# EAGLE board PowerSystemOverview (EAGLE 9.2.1)

Size 160 x 100 mm. Coordinates in mm from the lower left corner, seen from the top.
Outline: 0,0 160,0 160,100 0,100 0,0
Copper layers (1*16): Top 0.035mm / dielectric 1.5mm / Bottom 0.035mm
Design rules "default": minimum track width 6mil, minimum drill 0.35mm, track to track 6mil, track to pad 6mil, pad to pad 6mil, via to via 6mil, smd to smd 6mil, copper to edge 40mil, drill to drill 6mil, minimum pad ring 10mil, minimum via ring 8mil, stop-mask expansion 4mil, vias tented up to drill 0mil, thermal gap 10mil

## Footprints (pad centres in the part's own frame; a part is rotated, then mirrored left to right if it is on the bottom)
0603-POLAR = smd 1.1 x 1: + 0.85,0; - -0.85,0
0402 = smd 0.85 x 0.9: 1 -0.58,0; 2 0.58,0
DO35-10 = drill 0.813 long: A 5.08,0; C -5.08,0
LED_SML0603 = smd 0.8 x 0.8: A 0.75,0; C -0.75,0
SUPER-SOT3 = smd 1 x 1.4: 1 -0.95,-1.1; 2 0.95,-1.1; 3 0,1.1
1210 = smd 1.27 x 2.06: 1 -1.755,0; 2 1.755,0
MSOP8 = smd 0.4 x 1.1: 1 -0.975,-2.25; 2 -0.325,-2.25; 3 0.325,-2.25; 4 0.975,-2.25; 5 0.975,2.25; 6 0.325,2.25; 7 -0.325,2.25; 8 -0.975,2.25
18650-CASE-PTH = drill 2 octagon: NEG -35.56,0; POS 35.56,0

## Placement (x,y rotation side)
C1  10uF  [0603-POLAR]  2.54,-15.24 0 top  (outside the outline)
C2  10uF  [0603-POLAR]  2.54,-62.23 0 top  (outside the outline)
C3  0.1uF  [0402]  2.54,-66.04 0 top  (outside the outline)
D1  1N4148DO35-10  [DO35-10]  7.62,-10.16 0 top  (outside the outline)
LED1  [LED_SML0603]  2.54,-25.4 0 top  (outside the outline)
Q1  FDN360P  [SUPER-SOT3]  2.54,-35.56 0 top  (outside the outline)
R1  0.1  [1210]  3.81,-20.32 0 top  (outside the outline)
R2  100K  [0402]  2.54,-29.21 0 top  (outside the outline)
U1  MCP7384XX  [MSOP8]  3.81,-3.81 0 top
U$1  18650PTH  [18650-CASE-PTH]  38.1,-49.53 0 top  (outside the outline)

## Library data of the parts
C1 C2 = SparkFun-Capacitors; PROD_ID: CAP-13210
C3 = SparkFun-Capacitors; PROD_ID: CAP-12416
D1 = diode
LED1 = eagle-ltspice; SPICEMODEL: NONE; SPICEPREFIX: D; SPICETYPE: diode
Q1 = transistor-power
R1 = SparkFun-Resistors; PROD_ID: RES-12374
R2 = SparkFun-Resistors; PROD_ID: RES-13495
U1 = SparkFun-IC-Power
U$1 = userlib

## Nets
+5V: D1.A
GND: C1.- C2.- C3.2 U1.6 U$1.NEG
N$1: Q1.2 R1.2 U1.1
N$2: Q1.1 U1.8
N$3: C1.+ D1.C LED1.A R1.1 R2.1 U1.2
N$4: R2.2 U1.4
N$5: LED1.C U1.3
N$6: C3.1 U1.5
N$7: C2.+ Q1.3 U1.7 U$1.POS

## Tracks (layer width: path | path; a pad name or v marks a point on that pad's centre or on a via)
GND  (4 unrouted)
N$1  (2 unrouted)
N$2  (1 unrouted)
N$3  (5 unrouted)
N$4  (1 unrouted)
N$5  (1 unrouted)
N$6  (1 unrouted)
N$7  (3 unrouted)